# Altium PCB Rackmount_DSP.PcbDoc (part 14 of 24)
Units mil, origin at the board's own origin, x right, y up, seen from the top; angles counter-clockwise.
Board outline 10629.92 x 8267.72 mil, 4 copper layers (Top Layer, Mid Layer 1, Mid Layer 2, Bottom Layer), stack 36.2 mil thick; 4500 components, 1565 nets, 9765 pads, 3289 vias.
Unrouted connection lines stored in the file: 1.
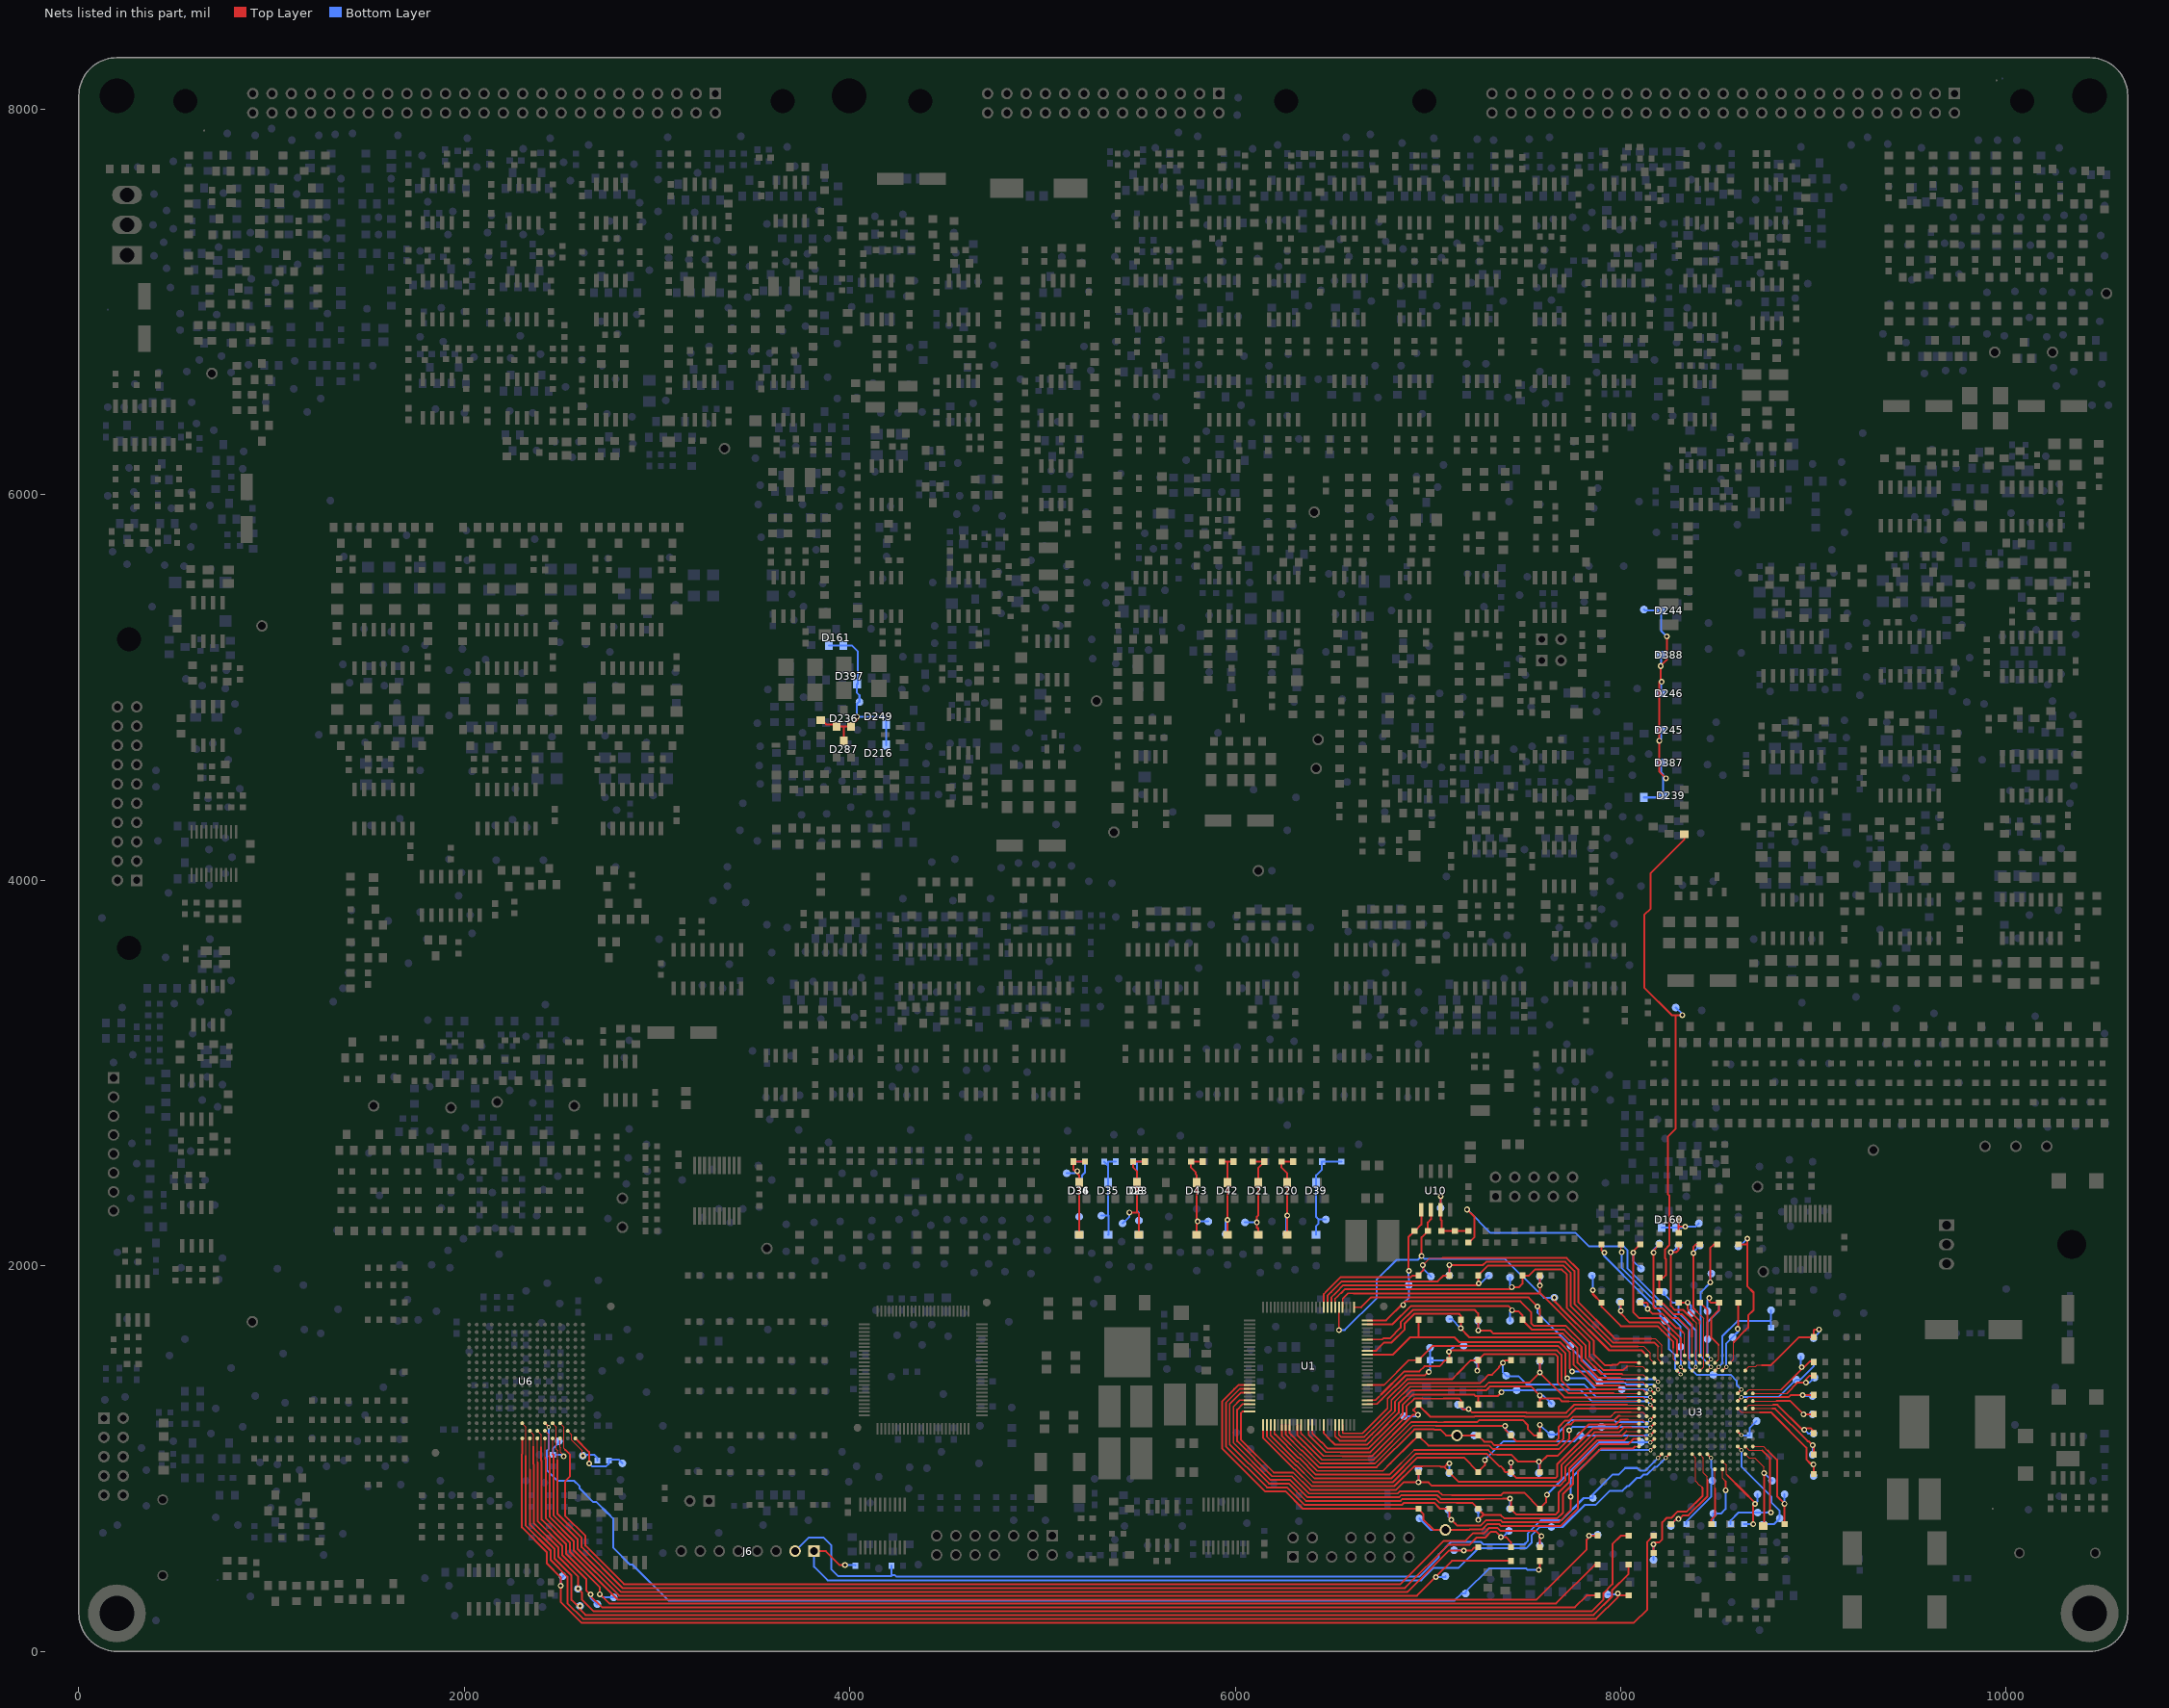
[diagram p16: the nets of this part, all layers, seen from the top]

## Via types
v1: diameter 30, hole 16, Top Layer to Bottom Layer, 3143 vias
v2: diameter 22, hole 12, Top Layer to Bottom Layer, 146 vias

## Nets (pads, with @x,y where several pads share a name; then routed paths per layer and width w, separated by ;. In a path a pad name is that pad's centre, name@x,y a point inside that pad or via, vN(x,y) a via of type N, cw(c..) or ccw(c..) an arc to the next point about the centre after c; other vN are vias at no path point) (continued)
REC_DSP_IS1+: C1079.2 D43.3 R11.1 R925.2 TP710.1 | length 512.4
  Top Layer w10: R11.1@5800,2160 v1@5800,2230 ; v1(5805.13,2230) v1@5800,2230 ; C1079.2@5830,2540 R925.2@5770,2540 5770,2510 5794.66,2485.34 5794.66,2475.34 5800,2470 D43.3@5800,2431.5 v1@5800,2230
  Bottom Layer w10: v1(5805.13,2230) TP710.1@5860,2230
REC_DSP_IS1-: C8.1 D23.3 R7.1 R914.2 TP711.1 | length 566.4
  Top Layer w10: v1(5450.67,2276.92) 5492.93,2276.92 ; R7.1@5500,2160 5500,2269.85 5492.93,2276.92 ; C8.1@5530,2540 R914.2@5470,2540 5470,2510 5490,2490 D23.3@5490,2431.5 5490,2279.85 5492.93,2276.92
  Bottom Layer w10: TP711.1@5415,2220 5450.67,2255.67 v1(5450.67,2276.92)
REC_DSP_IS2+/DSP_VCHG+: C14.2 D21.3 R16.1 R912.1 TP712.1 | length 525.7
  Top Layer w10: R912.1@6090,2540 C14.2@6150,2540 6150,2538.5 6120,2508.5 D21.3@6120,2431.5 6120,2262.82 6112.18,2255 v1(6112.18,2225) 6112.18,2195 6120,2195 R16.1@6120,2160
  Bottom Layer w10: TP712.1@6050,2225 v1(6112.18,2225)
REC_DSP_IS2-/DSP_VCHG-: C3.1 D36.3 R4.1 R906.2 TP713.1 | length 524.6
  Top Layer w10: v1(5180.4,2491.59) v1@5168.41,2491.59 ; R4.1@5190,2160 D36.3@5190,2431.5 5190,2470 v1@5168.41,2491.59 ; R906.2@5220,2540 C3.1@5160,2540 5160,2500 v1@5168.41,2491.59
  Bottom Layer w10: TP713.1@5125,2480 5168.81,2480 v1(5180.4,2491.59)
REC_DSP_IT1+/IBAT+_CHG: C1078.2 D42.3 R10.1 R927.2 TP714.1 | length 518.4
  Top Layer w10: R927.2@5930,2540 5959.27,2540 ; R10.1@5960,2160 v1(5960,2238.94) D42.3@5960,2431.5 5960,2435 5959.27,2435.73 5959.27,2540 ; C1078.2@5990,2540 5959.27,2540
  Bottom Layer w10: TP714.1@5950,2165 5950,2228.94 v1(5960,2238.94)
REC_DSP_IT1-/IBAT-_CHG: C5.1 D8.3 R6.1 R911.2 TP467.1 | length 444.1
  Bottom Layer w10: C5.1@5470,2540 5490,2540 ; R6.1@5500,2160 TP467.1@5500,2235 5500,2273.3 5490,2283.3 D8.3@5490,2431.5 5490,2540 ; R911.2@5530,2540 5490,2540
REC_DSP_IT2+/VBAT+: C13.2 D20.3 R15.1 R917.1 TP715.1 | length 554
  Top Layer w10: R15.1@6270,2160 v1(6270,2261.57) D20.3@6270,2431.5 6270,2480 6240,2510 R917.1@6240,2540 C13.2@6300,2540
  Bottom Layer w10: TP715.1@6265,2165 6265,2261.57 v1(6270,2261.57)
REC_DSP_IT2-/VBAT-: C4.1 D35.3 R3.1 R910.2 TP466.1 | length 486.4
  Bottom Layer w10: TP466.1@5305,2260 5340,2260 ; R910.2@5320,2540 5320,2539.55 5340,2519.55 ; R3.1@5340,2160 5341.31,2160 5341.31,2260 5340,2260 ; C4.1@5380,2540 5340,2540 5340,2519.55 ; 5340,2260 D35.3@5340,2431.5 5340,2519.55
REC_DSP_RESET: C507.1 R1051.2 TP716.1 U1.78 | length 616.3
  Top Layer w9: U1.78@6685.12,1283.15 6735.47,1283.15 6740,1287.68 6760.3,1307.97
  Top Layer w10: 6760.3,1307.97 6883.43,1431.11 6982.4,1431.11 7000.03,1448.74 v1(7004.15,1448.74)
  Bottom Layer w10: v1(7004.15,1448.74) 7010,1454.6 C507.1@7010,1510 ; TP716.1@7010,1575 C507.1@7010,1510 ; R1051.2@7110,1510 C507.1@7010,1510
REC_EEPROM_CTR: R752.1 R753.1 R1031.2 TP735.1 U10.7 | length 382.7
  Top Layer w10: v1(7065,2360.31) U10.7@7065,2290 7065,2240 7070,2235 R753.1@7070,2180 R752.1@7140,2180 R1031.2@7210,2180
  Bottom Layer w10: TP735.1@7065,2300 v1(7065,2360.31)
REC_EXT_IO_0: R1031.1 TP433.1 U3.C6 | length 2221.3
  Top Layer w10: v1(7202.16,2292.18) 7241,2253.34 7241,2150 7211,2120 R1031.1@7210,2120 ; U3.C6@8606.54,1338.43 v2(8626.22,1358.11)
  Bottom Layer w10: v1(7202.16,2292.18) 7203.63,2292.18 7325.23,2170.59 7765.79,2170.59 7836.43,2099.95 8016.78,2099.95 8034.35,2082.37 8034.35,2077.69 8034.35,1988.43 8354.14,1668.64 8354.14,1474.36 8393.5,1435 TP433.1@8480,1435 8569.71,1435 8601,1403.71 8601,1383.33 v2(8626.22,1358.11)
REC_EXT_IO_1: R1071.1 TP736.1 U3.K2 | length 905.1
  Top Layer w6: 8312.2,1572.88 8311.94,1572.88 8311.94,1514.91 U3.K2@8330.94,1495.91
  Top Layer w10: R1071.1@8100,2110 8099,2110 8064.35,2075.35 v1(8064.35,2068.2) 8064.35,1759.59 8095.8,1728.14 8206.54,1728.14 8269.68,1665 8312.2,1622.48 8312.2,1572.88
  Bottom Layer w10: v1(8064.35,2068.2) 8064.35,2025.65 TP736.1@8105,1985
REC_EXT_IO_2: R1072.1 TP737.1 U3.L1 | length 539.1
  Top Layer w10: R1072.1@8000,1810 v1@8000,1766.4 ; v1(8000.67,1765.73) v1@8000,1766.4 ; U3.L1@8291.57,1535.28 8291.57,1566.45 8292.2,1567.08 8292.2,1614.19 8241.4,1665 8198.89,1707.51 8044.35,1707.51 8000,1751.86 v1@8000,1766.4
  Bottom Layer w10: TP737.1@7995,1815 7995,1771.4 v1(8000.67,1765.73)
REC_EXT_IO_3: R1073.1 TP432.1 U3.K3 | length 791.4
  Top Layer w6: R1073.1@8000,2110 8000,2074.3 v1(8004.35,2069.95)
  Top Layer w10: v2(8311.26,1476.22) U3.K3@8330.94,1456.54
  Bottom Layer w10: v1(8004.35,2069.95) 8004.51,2069.95 8004.51,1989.99 8310,1684.5 TP432.1@8310,1580 8311.26,1580 v2(8311.26,1476.22)
REC_EXT_IO_4: R1074.1 TP738.1 U3.K1 | length 480.9
  Top Layer w6: 8323.24,1653.93 8330.94,1646.22 U3.K1@8330.94,1535.28
  Top Layer w10: R1074.1@8100,1810 8133.58,1810 8139,1804.58 v1(8139,1776.7) 8163.71,1752 8212.95,1752 8288.34,1676.6 8300.57,1676.6 8312.17,1665 8323.24,1653.93
  Bottom Layer w10: TP738.1@8100,1815 8138.3,1776.7 v1(8139,1776.7)
REC_EXT_IO_5: R1050.1 TP739.1 U3.A13 | length 553.7
  Top Layer w6: U3.A13@8685.28,1062.83 8739.45,1062.83 8760.71,1041.57 8763.44,1041.57 8763.44,1041
  Top Layer w10: 8763.44,1041 8790,1014.43 8810.89,993.54 8810.89,804.89 8849.41,766.37 8849.41,766.06 v1(8850,766.06) R1050.1@8850,660
  Bottom Layer w10: v1(8850,766.06) TP739.1@8850,815
REC_EXT_IO_6: R999.1 TP740.1 U3.H3 | length 762.1
  Top Layer w6: 8396.3,1761.02 8430.27,1727.06 8430.27,1691.13 8429.85,1690.71 8429.85,1665 8429.85,1476.7 U3.H3@8409.68,1456.54
  Top Layer w10: 8396.3,1761.02 8377.35,1779.98 v1(8377.35,2066.65) 8377.35,2099.18 8388.17,2110 R999.1@8410,2110
  Bottom Layer w10: v1(8377.35,2066.65) 8377.35,2072.35 TP740.1@8410,2105
REC_EXT_IO_7: R1000.1 TP431.1 U3.G3 | length 778.7
  Top Layer w10: U3.G3@8449.06,1456.54 v2(8468.74,1476.22) ; v1(8463.74,1914.9) 8463.74,2091.78 8481.95,2110 R1000.1@8500,2110
  Bottom Layer w10: v2(8468.74,1476.22) 8415,1529.96 8415,1862.63 8463.74,1911.36 v1(8463.74,1914.9) 8463.74,1950.44 8471.65,1958.35 TP431.1@8470,1960
REC_EXT_IO_8: R1060.1 TP741.1 U3.J14 | length 783.2
  Top Layer w6: U3.J14@8370.32,1023.46 8389.32,1004.46 8389.32,882.79 ; 8389.34,882.76 8389.34,880.9 8405.74,864.5 8407.49,864.5 8421.94,850.05
  Top Layer w10: R1060.1@8170,510 v1(8170,555.91) 8170,565.91 8200,565.91 8215,580.91 8215,669.22 8238.47,692.69 8263.45,692.69 8296.36,725.6 8343.1,725.6 8424.92,807.43 8424.92,835 8424.92,847.06 8421.94,850.05
  Bottom Layer w10: TP741.1@8170,475 v1(8170,555.91)
REC_EXT_IO_9: R1055.1 TP742.1 U3.H14 | length 544.4
  Top Layer w6: U3.H14@8409.68,1023.46 8428.68,1004.46 8428.68,925.45 8448.21,905.92 8448.21,889.3
  Top Layer w10: R1055.1@8260,660 8261,660 8287.69,686.69 v1(8299.99,686.69) 8305.21,686.69 8323.81,705.3 8351.19,705.3 8448.21,802.32 8448.21,835 8448.21,889.3
  Bottom Layer w10: TP742.1@8260,650 8260,658.52 8288.17,686.69 v1(8299.99,686.69)
REC_EXT_IO_10: R1059.1 TP446.1 U3.B13 | length 687.3
  Top Layer w6: U3.B13@8645.91,1062.83 8665.41,1043.33 8732.82,1043.33
  Top Layer w10: 8732.82,1043.33 8773.09,1003.06 8773.09,835 8773.09,721.3 8779.21,721.3 v1(8779.21,720.49)
  Bottom Layer w10: R1059.1@8570,660 8570,679.22 8610.78,720 TP446.1@8710,720 8761.36,720 8762.66,721.3 8779.21,721.3 v1(8779.21,720.49)
REC_EXT_IO_11: R1004.1 U3.F16 | length 292.4
  Top Layer w6: 8488.43,844.72 U3.F16@8488.43,944.72
  Top Layer w10: R1004.1@8470,660 8470,683.45 8488.43,701.87 8488.43,835 8488.43,844.72
REC_EXT_IO_12: R1005.1 TP445.1 U3.G14 | length 434.9
  Top Layer w10: U3.G14@8449.06,1023.46 v2(8468.74,1003.78)
  Bottom Layer w10: R1005.1@8340,660 8339.56,660 8339.56,673.02 8468.74,802.19 8468.74,864.37 8480,875.63 8480,880 TP445.1@8475,885 8475,945.76 8468.74,952.02 v2(8468.74,1003.78)
REC_EXT_IO_13: R1006.1 TP744.1 U3.H1 | length 410.4
  Top Layer w6: U3.H1@8409.68,1535.28 8409.68,1558.28 8410.34,1558.93 8410.34,1665 8410.34,1698.58
  Top Layer w10: R1006.1@8300,1810 8347.11,1810 v1(8347.35,1809.76) 8347.35,1775.82 8410.34,1712.82 8410.34,1698.58
  Bottom Layer w10: v1(8347.35,1809.76) 8365,1792.11 TP744.1@8365,1755
REC_EXT_IO_14: R1007.1 TP444.1 U3.E3 | length 389.7
  Top Layer w10: U3.E3@8527.8,1456.54 v2(8547.48,1476.22) ; v1(8607.03,1673.08) 8607.03,1675.06 8609,1677.03 8609,1698.17 8610,1698.17 R1007.1@8610,1810
  Bottom Layer w10: v2(8547.48,1476.22) 8547.48,1597.48 TP444.1@8580,1630 8609,1659 8609,1671.11 v1(8607.03,1673.08)
REC_EXT_IO_15: R1008.1 TP745.1 U3.F2 | length 496.2
  Top Layer w6: U3.F2@8488.43,1495.91 8508.7,1516.18 8508.7,1557.6 8508.96,1557.86 8508.96,1586.17 8507.57,1587.56 8507.57,1590.34
  Top Layer w10: v1(8460,1833.13) 8460,1816.54 8466.54,1810 R1008.1@8509,1810 ; 8507.57,1590.34 8470.27,1627.64 8470.27,1665 8470.27,1730.55 8509,1769.28 R1008.1@8509,1810 ; R1008.1@8510,1810 R1008.1@8509,1810
  Bottom Layer w10: TP745.1@8450,1765 8450,1823.13 v1(8460,1833.13)
REC_EXT_IO_16: R1009.1 TP746.1 U3.D2 | length 817.6
  Top Layer w6: U3.D2@8567.17,1495.91 8586.53,1515.27 8586.53,1603.92
  Top Layer w10: 8586.53,1603.92 8587.17,1604.56 8587.17,1606.31 8645.85,1665 8661.03,1680.18 8661.03,1743.02 8688.95,1770.94 8688.95,1861.27 8656.14,1894.08 8656.14,2109.47 8655.6,2110 ; R1009.1@8610,2110 8655.6,2110 ; v1(8656.14,2140.53) 8656.14,2110.53 8655.6,2110
  Bottom Layer w10: TP746.1@8610,2100 8614.5,2100 8655.04,2140.53 v1(8656.14,2140.53)
REC_EXT_IO_17: R1010.1 U3.G1 | length 291.5
  Top Layer w6: U3.G1@8449.06,1535.28 8449.06,1635.28
  Top Layer w10: R1010.1@8410,1810 8411,1810 8449.06,1771.94 8449.06,1665 8449.06,1635.28
REC_EXT_IO_18: R1011.1 TP747.1 U3.E15 | length 505.6
  Top Layer w6: U3.E15@8527.8,984.09 8546.91,964.98 8546.91,919.68 8555.14,911.44
  Top Layer w10: 8555.14,911.44 8631.59,835 8696.85,769.73 v1(8696.85,765.35) 8687.61,765.35 v1(8687.61,660.79)
  Bottom Layer w10: R1011.1@8640,660 8686.83,660 v1(8687.61,660.79) ; v1(8696.85,765.35) 8710,778.5 TP747.1@8710,815
REC_EXT_IO_19: R1012.1 TP443.1 U3.L3 | length 874.8
  Top Layer w6: U3.L3@8291.57,1456.54 8310.85,1437.26 v2(8310.85,1436.96)
  Top Layer w10: R1012.1@7900,2110 7900,2080 7910.72,2069.28 v1(7914.51,2069.28)
  Bottom Layer w10: v1(7914.51,2069.28) 7913.26,2069.28 7913.26,2051.12 8114.38,1850 8114.5,1850 8205.25,1759.25 8205.25,1739.75 TP443.1@8230,1715 8230,1707.25 8250,1687.25 8250,1567.5 8282.82,1534.68 8282.82,1464.99 v2(8310.85,1436.96)
REC_EXT_IO_20: R1013.1 TP748.1 U3.B3 | length 548.1
  Top Layer w6: U3.B3@8645.91,1456.54 8666.28,1476.91 8701,1476.91 8708.39,1484.29 8730.33,1484.29
  Top Layer w10: 8730.33,1484.29 8778.71,1484.29 8790,1495.58 8924.42,1630 R1013.1@9000,1630 9000,1665 9005,1670 v1(9028.33,1670)
  Bottom Layer w10: TP748.1@9000,1625 9028.33,1653.33 v1(9028.33,1670)
REC_EXT_IO_21: R1014.2 TP749.1 U3.L2 | length 750.8
  Top Layer w6: 8272.2,1575.36 8272.2,1515.28 U3.L2@8291.57,1495.91
  Top Layer w10: v1(7855,1873.97) 7855,1854 7899,1810 R1014.2@7900,1810 7900,1787.03 7999.9,1687.13 8190.98,1687.13 8213.11,1665 8272.2,1605.91 8272.2,1575.36
  Bottom Layer w10: TP749.1@7850,1950 7852.2,1950 7855,1947.2 v1(7855,1873.97)
REC_EXT_IO_22: R1054.2 TP442.1 U3.E16 | length 341.8
  Top Layer w6: U3.E16@8527.8,944.72 8527.8,897.93 8544.02,881.71
  Top Layer w10: v1(8544.02,835.71) 8544.02,881.71
  Bottom Layer w10: R1054.2@8480,660 TP442.1@8480,715 8520.74,715 8544.02,738.28 v1(8544.02,835.71)
REC_EXT_IO_23: R1056.2 TP441.1 U3.C13 | length 560.8
  Top Layer w10: U3.C13@8606.54,1062.83 v2(8626.22,1043.15)
  Bottom Layer w10: v2(8626.22,1043.15) 8626.22,957.64 8782.5,801.36 8782.5,771.27 8825,728.77 TP441.1@8825,690 8795,660 R1056.2@8740,660
REC_EXT_IO_24: R1067.2 U3.J1 | length 377.8
  Top Layer w6: U3.J1@8370.32,1535.28 8370.32,1632.6
  Top Layer w10: R1067.2@8200,1810 8213.84,1810 8275.48,1748.37 8317.18,1748.37 8370.32,1695.23 8370.32,1665 8370.32,1632.6
REC_EXT_IO_25: R1017.2 TP750.1 U3.J2 | length 812.5
  Top Layer w6: 8350.63,1664.06 8350.63,1515.59 U3.J2@8370.32,1495.91
  Top Layer w8: 8350.19,1675.62 8350.19,1665 8350.19,1664.5 8350.63,1664.06
  Top Layer w10: v1(8170.56,2068.73) v1@8169.76,2068.73 ; R1017.2@8200,2110 8199,2110 8169.76,2080.76 v1@8169.76,2068.73 ; 8350.19,1675.62 8298.05,1727.76 8266.81,1727.76 8214.6,1779.98 8175.55,1779.98 8169,1786.53 8169,2021.21 8169.76,2021.98 v1@8169.76,2068.73
  Bottom Layer w10: v1(8170.56,2068.73) 8169.76,2068.73 8169.76,2084.76 TP750.1@8200,2115
REC_EXT_IO_26: R1018.2 TP440.1 U3.J3 | length 503.5
  Top Layer w6: U3.J3@8370.32,1456.54 8389.28,1475.5 v2(8389.28,1475.99)
  Bottom Layer w10: TP440.1@8225,1865 8224.77,1864.77 8224.77,1852.91 8267.68,1810 R1018.2@8300,1810 8300,1755.5 8389.28,1666.23 v2(8389.28,1475.99)
REC_EXT_IO_27: R1019.2 TP751.1 U3.H2 | length 789.3
  Top Layer w6: 8377.96,1716.92 8392.34,1702.54 8392.34,1665 8392.34,1560.91 8390.68,1559.25 8390.68,1515.28 8409.68,1496.28 U3.H2@8409.68,1495.91
  Top Layer w10: R1019.2@8300,2110 8300,2083.16 8286.84,2070 v1(8260,2070) 8260,1792.13 8281.57,1770.56 8324.32,1770.56 8377.96,1716.92
  Bottom Layer w10: v1(8260,2070) 8265,2070 TP751.1@8300,2105
REC_EXT_IO_28: R1020.2 TP439.1 U3.F3 | length 570.1
  Top Layer w10: U3.F3@8488.43,1456.54 v2(8508.11,1476.22)
  Bottom Layer w10: v2(8508.11,1476.22) 8527.48,1495.59 8527.48,1636.46 8604.85,1713.83 8605.05,1713.62 8776.38,1713.62 ; R1020.2@8780,1680 8780,1710 8776.38,1713.62 ; TP439.1@8780,1770 8780,1720.69 8776.38,1717.07 8776.38,1713.62
REC_EXT_IO_29: R1021.2 TP438.1 U3.G2 | length 354.9
  Top Layer w10: U3.G2@8449.06,1495.91 v2(8468.74,1515.59)
  Bottom Layer w10: v2(8468.74,1515.59) 8450,1534.33 TP438.1@8450,1620 8450,1708.88 8510,1768.88 R1021.2@8510,1810
REC_EXT_IO_30: R1075.2 TP752.1 U3.A6 | length 416.5
  Top Layer w6: U3.A6@8685.28,1338.43 8790,1338.43 8862.08,1338.43 8862.62,1338.96
  Top Layer w10: 8862.62,1338.96 8918.56,1394.91 v1(8960.49,1394.91) 8960.49,1410.11 8980.38,1430 R1075.2@9000,1430
  Bottom Layer w10: v1(8960.49,1394.91) 8979.91,1394.91 TP752.1@9005,1420
REC_EXT_IO_31: R1076.1 TP753.1 U3.B6 | length 488.1
  Top Layer w6: U3.B6@8645.91,1338.43 8664.91,1357.43 8790,1357.43 8831.94,1357.43
  Top Layer w10: 8831.94,1357.43 8939.29,1464.77 v1(8939.29,1475) 8952.13,1475 8980.16,1503.02 9000,1503.02 R1076.1@9000,1500
  Bottom Layer w10: TP753.1@8935,1530 8935,1479.29 v1(8939.29,1475)
REC_EXT_IO_32: R996.1 TP754.1 U3.C8 | length 690.5
  Top Layer w6: U3.C8@8606.54,1259.68 8626.22,1240 8722.01,1240
  Top Layer w10: 8722.01,1240 8779.55,1240 8790,1229.55 8962.62,1056.93 8962.62,996.13 8983.83,974.91 v1@8999.78,974.91 ; v1(8999.78,969.69) v1@8999.78,974.91 ; R996.1@9000,920 9000,958.75 8991.81,966.94 v1@8999.78,974.91
  Bottom Layer w10: v1(8999.78,969.69) 8999.78,974.91 8991.81,966.94 9000,958.75 TP754.1@9000,910
REC_EXT_IO_33: R995.1 TP755.1 U3.B8 | length 493.4
  Top Layer w6: U3.B8@8645.91,1259.68 8664.91,1278.68 8790,1278.68 8790.84,1278.68
  Top Layer w10: 8790.84,1278.68 8813.29,1278.68 8942.53,1149.44 v1(8952.23,1149.44) 8959.39,1156.61 8987.28,1156.61 9000,1143.89 R995.1@9000,1130
  Bottom Layer w10: v1(8952.23,1149.44) 8971.67,1130 TP755.1@9000,1130
REC_EXT_IO_34: R994.1 TP756.1 U3.A8 | length 488.8
  Top Layer w6: U3.A8@8685.28,1259.68 8784.75,1259.68 8785.75,1258.68 8786.32,1258.68
  Top Layer w10: 8786.32,1258.68 8790,1258.68 8800.56,1258.68 8969.03,1090.22 8973.79,1090.22 v1(8995,1069) 9000,1064 R994.1@9000,1020
  Bottom Layer w10: TP756.1@8995,1020 v1(8995,1069)
REC_EXT_IO_35: R993.1 TP500.1 U3.C7 | length 489.5
  Top Layer w10: U3.C7@8606.54,1299.06 v2(8626.22,1318.74)
  Bottom Layer w10: v2(8626.22,1318.74) 8818.74,1318.74 TP500.1@8910,1410 8931.93,1410 9000,1478.07 R993.1@9000,1500
REC_EXT_IO_36: R997.1 TP758.1 U3.B7 | length 419.7
  Top Layer w6: U3.B7@8645.91,1299.06 8665.82,1318.96 8790,1318.96 8829.57,1318.96
  Top Layer w10: 8829.57,1318.96 8870.9,1318.96 8881.93,1330 v1(8944.33,1330) R997.1@9000,1330
  Bottom Layer w10: v1(8944.33,1330) 8949.33,1325 TP758.1@8995,1325
REC_EXT_IO_37: R998.1 TP757.1 U3.A7 | length 390.8
  Top Layer w6: U3.A7@8685.28,1299.06 8790,1299.06 8810.08,1299.06
  Top Layer w10: 8810.08,1299.06 8879.6,1299.06 8947.92,1230.73 v1(8947.92,1230) R998.1@9000,1230
  Bottom Layer w10: v1(8947.92,1230) TP757.1@8995,1230
REC_GPIO_0: R26.1 TP759.1 U1.47 U3.R12 | length 2953.5
  Top Layer w6: 8029.48,1105.34 8046.49,1122.35 8113.94,1122.35 U3.R12@8134.09,1102.2
  Top Layer w9: U1.47@6074.88,1302.83 6040,1302.83 6023.7,1302.83 5990.29,1269.42 5990.29,1082.13 6183.2,889.21 6284.55,889.21 6374.26,799.5 6850.02,799.5 6860.52,810 6901.63,810 ; 7290.99,791 7386.98,791 7388.81,792.83 v1(7425,792.83)
  Top Layer w10: 6901.63,810 7047.37,810 7066.37,791 7290.99,791 ; v1(7425,792.83) 7430,787.83 R26.1@7430,740 7430,739 7460,709 7661.21,709 7677.41,725.2 7677.41,823.99 7732.4,878.98 7732.4,947.88 7879.95,1095.42 7955,1095.42 8019.56,1095.42 8029.48,1105.34
  Bottom Layer w10: TP759.1@7425,740 v1(7425,792.83)
REC_GPIO_1: R27.1 TP760.1 U1.44 U3.P13 | length 3142.1
  Top Layer w6: v2(8154.37,1043.57) 8154.37,1043.74 U3.P13@8173.46,1062.83
  Top Layer w9: 5951.34,1175.24 5951.34,1289.53 6023.7,1361.89 6040,1361.89 U1.44@6074.88,1361.89
  Top Layer w10: 5951.34,1175.24 5951.34,1064.19 6164.81,850.71 6268.6,850.71 6358.32,761 6865.97,761 6875.97,771 7031.21,771 7062.21,740 R27.1@7110,740 7110,694.43 7120.54,683.89 v1(7120.54,682.94) 7141.76,661.73 7142.7,661.73 7152.79,651.64 7272.29,651.64 7301.21,680.56 7376.1,680.56 7387.66,669 7677.78,669 7739.59,730.8 v1(7739.59,802.09)
  Bottom Layer w10: TP760.1@7105,735 7105,698.49 v1(7120.54,682.94) ; v1(7739.59,802.09) 7739.59,895 7888.16,1043.57 v2(8154.37,1043.57)
REC_GPIO_2: R28.1 TP761.1 U1.45 U3.T12 | length 2992.6
  Top Layer w9: U1.45@6074.88,1342.2 6040,1342.2 6030.88,1342.2 5970.94,1282.26 5970.94,1073.61 6174.33,870.21 6276.68,870.21 6366.39,780.5 6857.89,780.5 6867.89,790.5 7039.29,790.5 7058.79,771 7148.79,771
  Top Layer w10: 7148.79,771 7230,771 7260,741 R28.1@7260,740 7260,739 7285.61,713.39 7285.61,707.38 ; v1(7259.86,681.64) 7285.61,707.38 ; U3.T12@8094.72,1102.2 8066.94,1102.2 8040.09,1075.35 7955,1075.35 7888.32,1075.35 7752.84,939.87 7752.84,869.74 7700.02,816.93 7700.02,719.52 7669.5,689 7395.95,689 7377.56,707.38 7285.61,707.38
  Bottom Layer w10: v1(7259.86,681.64) 7260,681.78 TP761.1@7260,735
REC_GPIO_3: R29.1 TP499.1 U1.48 U3.P12 | length 2741.8
  Top Layer w9: U1.48@6074.88,1283.15 6040,1283.15 6038.82,1283.15 6009.5,1253.83 6009.5,1090.03 6191.31,908.21 6292.42,908.21 6382.13,818.5 6842.15,818.5 6853.15,829.5 7055.44,829.5 7073.94,811 7122.44,811
  Top Layer w10: 7122.44,811 7379.4,811 7391.23,822.83 7498.17,822.83 R29.1@7580,741 ; R29.1@7580,740 R29.1@7580,741 ; v1(7616.56,812.33) 7611.85,807.63 7611.85,772.85 R29.1@7580,741 ; v2(8153.78,1082.52) U3.P12@8173.46,1102.2
  Bottom Layer w10: v1(7616.56,812.33) 7889.22,1085 TP499.1@8105,1085 8151.3,1085 v2(8153.78,1082.52)
REC_GPIO_4: R30.1 TP762.1 U1.51 U3.R11 | length 2487.9
  Top Layer w6: 8051.51,1161.53 8114.14,1161.53 U3.R11@8134.09,1141.57
  Top Layer w9: U1.51@6143.78,1174.88 6143.78,1125 6143.78,1107.46 6305.02,946.21 6308.16,946.21 6396.37,858 6825.79,858 ; 6970.86,961 7061.96,961 7066.35,956.61 7084.39,956.61 7110,931 R30.1@7110,930
  Top Layer w10: 6825.79,858 6928.79,961 6970.86,961 ; 7084.39,956.61 7103.05,975.26 v1(7110,975.26) ; R30.1@7110,930 7110,929 7160,879 7674.23,879 7691.89,896.66 7691.89,965.13 7862.87,1136.11 7955,1136.11 7989.96,1136.11 8015.38,1161.53 8051.51,1161.53
  Bottom Layer w10: TP762.1@7110,925 v1(7110,975.26)
REC_GPIO_5: R31.1 TP763.1 U1.53 U3.T10 | length 2424.4
  Top Layer w6: 8000.62,1175.05 8006.51,1180.94 U3.T10@8094.72,1180.94
  Top Layer w9: U1.53@6183.15,1174.88 6183.15,1125 6183.15,1121.83 6320.76,984.21 6323.9,984.21 6410.73,897.38 6808.6,897.38
  Top Layer w10: 6808.6,897.38 6936.48,1025.26 7304.45,1025.26 7369.71,960 7376.82,960 7394.39,942.43 7394.39,935.61 7400,930 R31.1@7430,930 ; v1(7430,978.85) R31.1@7430,930 ; 8000.62,1175.05 7982.17,1156.6 7955,1156.6 7854.94,1156.6 7670.52,972.18 7670.52,908.31 7661.21,899 7460,899 7430,929 R31.1@7430,930
  Bottom Layer w10: TP763.1@7430,925 v1(7430,978.85)
REC_GPIO_6: R32.1 TP498.1 U1.56 U3.P10 | length 2255.8
  Top Layer w9: U1.56@6242.2,1174.88 6242.2,1125 6242.2,1116.51 6336.5,1022.21 6339.64,1022.21 6425.97,935.88 6765.88,935.88 6805.35,975.35
  Top Layer w10: 6805.35,975.35 6923.39,1093.39 6924.39,1093.39 R32.1@6950,1119 ; R32.1@6950,1120 R32.1@6950,1119 ; v1(7732.85,1147.77) 7732.85,1104.07 7677.78,1049 7335.86,1049 7317.41,1067.46 7001.54,1067.46 R32.1@6950,1119 ; v2(8153.78,1161.26) U3.P10@8173.46,1180.94
  Bottom Layer w10: v1(7732.85,1147.77) 7734.57,1147.77 7751.81,1165 TP498.1@7900,1165 8153.78,1165 v2(8153.78,1161.26)
REC_GPIO_7: R33.1 TP764.1 U1.58 U3.R9 | length 2250.9
  Top Layer w6: 8053.27,1239.91 8114.5,1239.91 U3.R9@8134.09,1220.32
  Top Layer w8: 7953.7,1223.45 7955,1224.75 7970.39,1240.14 8053.27,1240.14 8053.27,1239.91
  Top Layer w9: U1.58@6281.57,1174.88 6281.57,1130.88 6287.46,1125 6351.74,1060.71 6354.88,1060.71 6440.71,974.88 6725.09,974.88 6920.71,1170.5 7039.29,1170.5 7040.29,1169.5 7071.63,1169.5 7072.13,1169 7262.8,1169 7263.7,1169.9 7264.41,1169.9
  Top Layer w10: 7264.41,1169.9 v1(7399.22,1169.9) 7399.22,1151.78 7430,1121 R33.1@7430,1120 7430,1119 7460,1089 7661.21,1089 7676.43,1104.21 7676.43,1162.05 7712.14,1197.77 7733.47,1197.77 7753.41,1217.71 7947.96,1217.71 7953.7,1223.45
  Bottom Layer w10: v1(7399.22,1169.9) 7399.22,1155.78 TP764.1@7430,1125
REC_GPIO_8: R34.1 TP765.1 U1.60 U3.P9 | length 2213.6
  Top Layer w9: U1.60@6320.94,1174.88 6320.94,1125 6320.94,1123.7 6450.76,993.88 6717.22,993.88 6912.84,1189.5 7047.16,1189.5 7048.16,1188.5 7082,1188.5
  Top Layer w10: 7082,1188.5 7254.72,1188.5 7266.12,1199.9 7491.97,1199.9 7517.25,1174.61 7517.25,1152.75 7550,1120 R34.1@7580,1120 v1(7580,1175.4) ; v2(8153.78,1200.63) U3.P9@8173.46,1220.32
  Bottom Layer w10: v1(7580,1175.4) 7630.4,1125 TP765.1@7640,1125 7667.66,1125 7742.66,1200 7964.29,1200 7974.29,1190 8143.15,1190 v2(8153.78,1200.63)
REC_GPIO_9: R35.1 TP766.1 U1.61 U3.T8 | length 2127.3
  Top Layer w9: U1.61@6340.63,1174.88 6340.63,1130.88 6346.51,1125 6458.13,1013.38 6555.03,1013.38
  Top Layer w10: 6555.03,1013.38 6709.14,1013.38 6922.88,1227.12 v1(6947.45,1227.12) 6924.39,1250.18 6924.39,1253.39 R35.1@6950,1279 ; R35.1@6950,1280 R35.1@6950,1279 ; U3.T8@8094.72,1259.68 8039.77,1259.68 8039.45,1259.37 7955,1259.37 7766.79,1259.37 7725.19,1217.77 7502.38,1217.77 7500.25,1219.9 7243.81,1219.9 7239.69,1215.79 7013.21,1215.79 R35.1@6950,1279
  Bottom Layer w10: TP766.1@6875,1220 6940.33,1220 v1(6947.45,1227.12)
REC_GPIO_10: R36.1 TP497.1 U1.64 U3.P8 | length 2095.3
  Top Layer w9: U1.64@6399.69,1174.88 6399.69,1130.88 6405.57,1125 6445.33,1085.24 6446.53,1085.24
  Top Layer w10: 6446.53,1085.24 6478.39,1053.38 6692.19,1053.38 6868.1,1229.29 6868.1,1278.59 6920.5,1331 7240.31,1331 7247.99,1323.31 7260,1323.31 ; R36.1@7260,1280 7260,1323.31 ; v1(7381.59,1344.53) 7360.38,1323.31 7260,1323.31 ; v2(8153.78,1279.37) U3.P8@8173.46,1259.68
  Bottom Layer w10: v1(7381.59,1344.53) 7392.06,1355 TP497.1@7460,1355 7564.65,1355 7567.57,1357.93 7788.79,1357.93 7848.96,1297.75 8135.39,1297.75 v2(8153.78,1279.37)
REC_GPIO_11: R37.1 TP767.1 U1.70 U3.R7 | length 2043.1
  Top Layer w6: 8026.72,1317.77 8027.06,1317.77 8027.41,1318.12 8115.03,1318.12 U3.R7@8134.09,1299.06
  Top Layer w9: U1.70@6517.8,1174.88 6517.8,1125 6517.8,1116.51 6541.43,1092.88 6675.82,1092.88 6707.94,1125 6740,1157.06 6828.6,1245.65 6828.6,1294.96 6907.05,1373.41 7293.46,1373.41 7314.58,1394.53 7320.53,1394.53
  Top Layer w10: 7320.53,1394.53 7527.99,1394.53 v1(7580,1446.54) ; R37.1@7580,1510 v1(7580,1446.54) ; 8026.72,1317.77 7955,1317.77 7708.77,1317.77 v1(7580,1446.54)
  Bottom Layer w10: v1(7580,1446.54) TP767.1@7580,1505
REC_GPIO_12: R38.1 TP496.1 U1.1 U3.P4 | length 1907.4
  Top Layer w6: U3.P4@8173.46,1417.17 8192.56,1398.07 v2(8193.59,1398.07)
  Top Layer w9: U1.1@6616.22,1785.12 6652.62,1785.12
  Top Layer w10: 6652.62,1785.12 6702.51,1835 6703.3,1835.8 7522.13,1835.8 7567.35,1790.58 v1(7567.35,1789.03) 7580,1776.38 R38.1@7580,1720
  Bottom Layer w10: v1(7567.35,1789.03) 7567.35,1757.65 TP496.1@7740,1585 7740,1574.52 7854.52,1460 7886.72,1460 7931.72,1415 8027.78,1415 8031.5,1411.28 8180.38,1411.28 v2(8193.59,1398.07)
REC_GPIO_13: R39.1 TP768.1 U1.95 U3.R5 | length 1838.3
  Top Layer w6: 8011.35,1399.19 8013.05,1397.48 8114.41,1397.48 U3.R5@8134.09,1377.8
  Top Layer w9: U1.95@6685.12,1617.8 6740,1617.8 6761.48,1617.8 6767.63,1623.95 6770.16,1623.95
  Top Layer w10: 6770.16,1623.95 6802.11,1623.95 6858.22,1680.05 6858.22,1708.71 6921.05,1771.55 7241.52,1771.55 7260,1753.07 R39.1@7260,1720 v1(7260,1665.24) 7260,1664.79 7323,1664.79 7339.07,1648.71 7699.06,1648.71 7775.18,1572.6 7775.18,1497.02 7873.01,1399.19 7955,1399.19 8011.35,1399.19
  Bottom Layer w10: v1(7260,1665.24) TP768.1@7260,1715
REC_GPIO_14: R40.1 TP769.1 U1.8 U3.N2 | length 2311.1
  Top Layer w6: 8193.83,1580.47 8193.83,1514.91 U3.N2@8212.83,1495.91
  Top Layer w9: U1.8@6478.43,1785.12 6478.43,1835 6478.43,1844.9 6498.53,1865.01
  Top Layer w10: 6498.53,1865.01 6552.52,1919 7049.67,1919 7080.67,1950 R40.1@7110,1950 v1(7110,2004.61) 7285.33,2004.61 7301.72,2021 7711.37,2021 7759.33,1973.04 7759.33,1801.84 7955,1606.17 7958.65,1602.52 8173.77,1602.52 8193.83,1582.45 8193.83,1580.47
  Bottom Layer w10: TP769.1@7110,1950 v1(7110,2004.61)
REC_GPIO_15: R41.1 TP770.1 U1.9 U3.N1 | length 2337.5
  Top Layer w6: v1(6972.24,2003.54) 7009.71,2041 7076.77,2041 ; 8159.28,1622.6 8179.15,1622.6 8212.83,1588.91 U3.N1@8212.83,1535.28
  Top Layer w9: U1.9@6458.74,1785.12 6458.74,1835 6458.74,1853.5 6474.55,1869.31
  Top Layer w10: 6474.55,1869.31 6546.97,1941.73 6911.73,1941.73 6920,1950 R41.1@6950,1950 6950,1951 6975.61,1976.61 6975.61,2000.17 v1(6972.24,2003.54) ; 7076.77,2041 7719.66,2041 7779.33,1981.33 7779.33,1812.17 7955,1636.5 7968.86,1622.65 8159.22,1622.65 8159.28,1622.6
  Bottom Layer w10: v1(6972.24,2003.54) 6972.24,1987.76 TP770.1@7015,1945
REC_GPIO_16: R42.1 TP771.1 U1.50 U3.T11 | length 2662.7
  Top Layer w6: 8028.56,1141.57 U3.T11@8094.72,1141.57
  Top Layer w9: U1.50@6074.88,1243.78 6040,1243.78 6036.86,1243.78 6028.59,1235.51 6028.59,1098.43 6199.8,927.21 6300.29,927.21 6389.5,838 6395.19,838
  Top Layer w10: 6395.19,838 6834.07,838 6872.94,876.87 v1(6950,876.87) ; R42.1@6950,930 v1(6950,876.87) ; 8028.56,1141.57 8002.95,1115.97 7955,1115.97 7872.06,1115.97 7712.26,956.18 7712.26,887.8 7683.46,859 7020,859 7002.13,876.87 v1(6950,876.87)
  Bottom Layer w10: v1(6950,876.87) TP771.1@6950,945
REC_GPIO_17: R43.1 TP495.1 U1.52 U3.P11 | length 2356.4
  Top Layer w9: U1.52@6163.46,1174.88 6163.46,1125 6163.46,1114.64 6312.89,965.21 6316.03,965.21 6403.74,877.5 6817,877.5
  Top Layer w10: 6817,877.5 6944.76,1005.26 7185.74,1005.26 R43.1@7260,931 ; R43.1@7260,930 R43.1@7260,931 ; v1(7294.44,992.85) 7294.44,965.44 R43.1@7260,931 ; v2(8153.78,1121.89) U3.P11@8173.46,1141.57
  Bottom Layer w10: v1(7294.44,992.85) 7391.59,1090 7760,1090 TP495.1@7790,1120 8125.89,1120 8127.78,1121.89 v2(8153.78,1121.89)
REC_GPIO_18: R44.1 TP772.1 U1.54 U3.R10 | length 2356
  Top Layer w6: 8036.88,1201.14 8113.9,1201.14 U3.R10@8134.09,1180.94
  Top Layer w9: U1.54@6202.83,1174.88 6202.83,1129.01 6206.85,1125 6328.63,1003.21 6331.77,1003.21 6418.1,916.88 6800.52,916.88 6928.4,1044.76 7312.52,1044.76 7336.79,1020.5 7358.78,1020.5
  Top Layer w10: 7358.78,1020.5 7430.78,1020.5 7467.75,983.53 v1(7575,983.53) ; R44.1@7580,930 7580,978.53 v1(7575,983.53) ; 8036.88,1201.14 7998.43,1201.14 7974.37,1177.09 7955,1177.09 7834.62,1177.09 7672.03,1014.5 7617.57,1014.5 7586.6,983.53 v1(7575,983.53)
  Bottom Layer w10: TP772.1@7575,925 v1(7575,983.53)
REC_GPIO_19: R45.1 TP2.1 TP773.1 U1.57 U3.T9 | length 2257
  Top Layer w6: 7995.55,1221.14 8094.58,1221.14 8094.72,1221 U3.T9@8094.72,1220.32
  Top Layer w9: U1.57@6261.89,1174.88 6261.89,1125 6261.89,1123.7 6343.87,1041.71 6347.01,1041.71 6433.34,955.38 6439.18,955.38
  Top Layer w10: 6439.18,955.38 6733.17,955.38 6928.79,1151 7031.21,1151 7032.21,1150 7063.55,1150 7093.55,1120 TP2.1@7150,1120 R45.1@7260,1120 7260,1119 7291.54,1087.46 7325.69,1087.46 7344.15,1069 7669.5,1069 7702.85,1102.36 7702.85,1160.2 7720.43,1177.77 7741.76,1177.77 7761.23,1197.25 7955,1197.25 7963.2,1197.25 7987.1,1221.14 7995.55,1221.14
  Bottom Layer w10: TP2.1@7150,1120 TP773.1@7240,1120
REC_GPIO_20: R46.1 TP774.1 U1.63 U3.R8 | length 2130.6
  Top Layer w6: 8031.17,1279.37 8114.41,1279.37 U3.R8@8134.09,1259.68
  Top Layer w9: U1.63@6380,1174.88 6380,1125 6380,1123.7 6470.31,1033.38 6546.75,1033.38 ; 6970.86,1311 7080,1311
  Top Layer w10: 6546.75,1033.38 6700.47,1033.38 6888.1,1221.01 6888.1,1270.31 6928.79,1311 6970.86,1311 ; 7080,1311 7162.12,1311 7170,1303.12 R46.1@7170,1280 7170,1267.86 7184.47,1253.39 7206.59,1253.39 v1(7210.19,1257) 7227.29,1239.9 7508.54,1239.9 7510.67,1237.77 7716.9,1237.77 7758.5,1279.37 7955,1279.37 8031.17,1279.37
  Bottom Layer w10: TP774.1@7155,1280 7178,1257 v1(7210.19,1257)
REC_GPIO_21: R47.1 TP775.1 U1.67 U3.T7 | length 2010.2
  Top Layer w6: 7729.16,1297.77 7899.8,1297.77 7901.09,1299.06 7955,1299.06 U3.T7@8094.72,1299.06
  Top Layer w9: U1.67@6458.74,1174.88 6458.74,1130.88 6464.62,1125 6482.75,1106.87
  Top Layer w10: 6482.75,1106.87 6516.24,1073.38 6683.9,1073.38 6735.52,1125 6740,1129.48 6848.1,1237.58 6848.1,1286.88 6915.13,1353.91 7213,1353.91 7301.54,1353.91 7310.44,1362.81 7322.15,1374.53 7533.4,1374.53 v1(7580,1327.93) 7580,1306.65 ; R47.1@7580,1280 7580,1306.65 ; 7729.16,1297.77 7693.52,1297.77 7680.29,1311 7584.35,1311 7580,1306.65
  Bottom Layer w10: v1(7580,1327.93) 7597.07,1327.93 TP775.1@7640,1285
REC_GPIO_22: R48.1 TP504.1 U1.71 U3.P7 | length 2042.9
  Top Layer w9: U1.71@6537.48,1174.88 6537.48,1125 6537.48,1123.7 6549.3,1111.88 6667.95,1111.88 6681.07,1125 6740,1183.93 6809.6,1253.52 6809.6,1302.83 6899.18,1392.41 7271.61,1392.41 7285.83,1406.64
  Top Layer w10: 7285.83,1406.64 7314.58,1435.38 7332.43,1435.38 7367.62,1470.58 7367.62,1475.15 v1(7388.84,1496.37) 7388.84,1498.84 7400,1510 R48.1@7430,1510 ; v2(8153.78,1318.74) U3.P7@8173.46,1299.06
  Bottom Layer w10: v1(7388.84,1496.37) 7388.84,1446.16 TP504.1@7405,1430 7404.71,1429.71 7407.25,1427.17 7468.89,1427.17 7511.37,1384.7 7808.45,1384.7 7874.41,1318.74 v2(8153.78,1318.74)
REC_GPIO_23: R49.1 TP776.1 U1.72 U3.T6 | length 2054
  Top Layer w6: 7962.15,1338.43 U3.T6@8094.72,1338.43
  Top Layer w9: U1.72@6557.17,1174.88 6557.17,1130.88 6660.08,1130.88 6740,1210.8 6790.1,1260.89 6790.1,1310.2 6891.31,1411.41 7123.62,1411.41 7150.6,1438.38
  Top Layer w10: 7150.6,1438.38 7222.21,1510 R49.1@7260,1510 ; v1(7255,1455.77) 7260,1460.77 R49.1@7260,1510 ; 7962.15,1338.43 7955,1338.43 7729.56,1338.43 7672.35,1395.63 7672.35,1529.87 7661.21,1541 7290,1541 7260,1511 R49.1@7260,1510
  Bottom Layer w10: v1(7255,1455.77) TP776.1@7255,1510
REC_GPIO_24: R50.1 TP503.1 U1.83 U3.P6 | length 1750.2
  Top Layer w9: U1.83@6685.12,1381.57 6740,1381.57 6770.9,1381.57 6899.32,1510 R50.1@6950,1510
  Top Layer w10: R50.1@6950,1510 6950,1511 7023.53,1584.53 7674.25,1584.53 7713.31,1545.48 7713.31,1417.06 v1(7722.71,1417.06) ; v2(8153.78,1358.11) U3.P6@8173.46,1338.43
  Bottom Layer w10: v1(7722.71,1417.06) 7812.94,1417.06 7870,1360 TP503.1@8005,1360 8125.89,1360 8127.78,1358.11 v2(8153.78,1358.11)
REC_GPIO_25: R51.1 TP777.1 U1.91 U3.P5 | length 1826.4
  Top Layer w6: U3.P5@8173.46,1377.8 8192.67,1358.59 v2(8192.82,1358.59)
  Top Layer w9: U1.91@6685.12,1539.06 6740,1539.06 6779.04,1539.06
  Top Layer w10: 6779.04,1539.06 6817.65,1539.06 6907.74,1629.14 6950,1629.14 ; R51.1@6950,1720 6950,1629.14 ; v1(7747.73,1452) 7747.73,1454.8 7734.29,1468.24 7734.29,1552.78 7682.54,1604.53 7160.44,1604.53 7135.83,1629.14 6950,1629.14
  Bottom Layer w10: v1(7747.73,1452) 7833,1452 TP777.1@7890,1395 8019.5,1395 8030.39,1384.11 8167.3,1384.11 v2(8192.82,1358.59)
REC_GPIO_26: R52.1 TP778.1 U1.99 U3.T4 | length 1723.4
  Top Layer w6: 7996.75,1419.19 8016.8,1419.19 8018.82,1417.17 U3.T4@8094.72,1417.17
  Top Layer w9: U1.99@6685.12,1696.54 6740,1696.54 6785.12,1696.54
  Top Layer w10: 6785.12,1696.54 6815.19,1696.54 6911.18,1792.53 7416.9,1792.53 7436.24,1773.19 v1(7436.24,1769.79) 7441,1765.02 7468.87,1765.02 7490,1743.89 R52.1@7490,1720 7490,1719 7540.29,1668.71 7707.34,1668.71 7796.19,1579.87 7796.19,1507.34 7884.34,1419.19 7955,1419.19 7996.75,1419.19
  Bottom Layer w10: TP778.1@7425,1715 7425,1758.55 v1(7436.24,1769.79)
REC_GPIO_27: R53.1 TP779.1 U1.79 U3.R6 | length 1844.7
  Top Layer w6: 8002.6,1358.43 8114.09,1358.43 U3.R6@8134.09,1338.43
  Top Layer w9: U1.79@6685.12,1302.83 6726.87,1302.83 6740,1315.96 6756,1331.96
  Top Layer w10: 6756,1331.96 6876.53,1452.5 6954.69,1452.5 6981.06,1478.87 7058.52,1478.87 7089.65,1510 R53.1@7110,1510 v1@7110,1551.13 ; v1(7107.55,1554.53) 7107.55,1553.58 v1@7110,1551.13 ; 8002.6,1358.43 7955,1358.43 7738.92,1358.43 7692.35,1405 7692.35,1538.15 7669.5,1561 7119.87,1561 v1@7110,1551.13
  Bottom Layer w10: v1(7107.55,1554.53) 7138.02,1585 TP779.1@7185,1585
REC_GPIO_28: R54.1 TP780.1 U1.92 U3.T5 | length 1825.4
  Top Layer w6: 7995.35,1378.43 8033.22,1378.43 8033.85,1377.8 U3.T5@8094.72,1377.8
  Top Layer w9: U1.92@6685.12,1558.74 6729.29,1558.74 6740,1569.45 6772.48,1601.93 6778.51,1601.93
  Top Layer w10: 6778.51,1601.93 6810.87,1601.93 6879.42,1670.48 6879.42,1701.63 6929.33,1751.55 7160.44,1751.55 7170,1741.99 R54.1@7170,1720 7169.55,1719.55 v1(7169.55,1676.39) 7169.55,1674.72 7215.55,1628.71 7688.53,1628.71 7754.55,1562.7 7754.55,1489 7865.12,1378.43 7955,1378.43 7995.35,1378.43
  Bottom Layer w10: TP780.1@7110,1725 7110.76,1724.24 7121.7,1724.24 v1(7169.55,1676.39)
REC_GPIO_29: R55.1 TP781.1 U1.4 U3.R3 | length 2001.3
  Top Layer w6: 8032.81,1478.87 8035.09,1481.16 8071.13,1481.16 8075.39,1476.91 8113.72,1476.91 U3.R3@8134.09,1456.54
  Top Layer w9: U1.4@6557.17,1785.12 6557.17,1829.12 6563.05,1835 6585.39,1857.34 6612.67,1857.34
  Top Layer w10: 6612.67,1857.34 7580,1857.34 7580,1861.89 ; R55.1@7580,1950 v1(7580,1897.84) 7580,1861.89 ; 8032.81,1478.87 8013.39,1459.45 7955,1459.45 7909.02,1459.45 7838.6,1529.88 7838.6,1603.3 7580,1861.89
  Bottom Layer w10: v1(7580,1897.84) TP781.1@7580,1945
REC_GPIO_30: R56.1 TP782.1 U1.6 U3.R1 | length 2095.9
  Top Layer w9: U1.6@6517.8,1785.12 6517.8,1829.12 6523.68,1835 6529.89,1841.21 6530.65,1841.21 6548.29,1858.85 6549.39,1858.85
  Top Layer w10: 6549.39,1858.85 6568.51,1877.97 7434.34,1877.97 v1(7434.34,1889.94) 7472.78,1889.94 7490,1907.16 R56.1@7490,1950 7523.55,1950 7554.55,1981 7694.81,1981 7719.33,1956.47 7719.33,1782.27 7939.94,1561.66 7955,1561.66 8107.71,1561.66 U3.R1@8134.09,1535.28
  Bottom Layer w10: TP782.1@7425,1940 7425,1899.28 v1(7434.34,1889.94)
REC_GPIO_31: R57.1 TP783.1 U1.7 U3.P2 | length 2255
  Top Layer w6: 8090.15,1581.72 8118.2,1581.72 8153.09,1546.83 8153.09,1516.28 U3.P2@8173.46,1495.91
  Top Layer w9: U1.7@6498.11,1785.12 6498.11,1835 6498.11,1836.3 6522.52,1860.71
  Top Layer w10: 6522.52,1860.71 6560.81,1899 7267.72,1899 7267.72,1902.15 7263.29,1902.15 v1@7263.29,1906.57 ; v1(7263.29,1908.77) 7267.72,1908.77 7267.72,1906.57 v1@7263.29,1906.57 ; 8090.15,1581.72 8090.15,1582.49 7955,1582.49 7950.3,1582.49 7739.33,1793.46 7739.33,1964.76 7703.09,2001 7310,2001 7260,1951 R57.1@7260,1950 7260,1909.87 v1@7263.29,1906.57
  Bottom Layer w10: v1(7263.29,1908.77) 7267.72,1908.77 7267.72,1902.72 TP783.1@7315,1950
REC_GPIO_32: R58.1 TP502.1 U1.100 U3.R4 U10.5 | length 2283.7
  Top Layer w6: 8007.03,1437.19 8008.05,1436.17 8115.09,1436.17 U3.R4@8134.09,1417.17
  Top Layer w9: U1.100@6685.12,1716.22 6740,1716.22 6781.87,1716.22 6782.37,1716.73
  Top Layer w10: 6782.37,1716.73 6783.27,1716.73 v1@6875.77,1809.23 ; v1(6871.01,1797.54) 6875.77,1797.54 v1@6875.77,1809.23 ; v1(6900.59,1973.02) 6898.32,1973.02 6898.32,2066.11 6897.54,2066.89 6897.54,2148.54 6929,2180 R58.1@6930,2180 6931,2180 6965,2214 U10.5@6965,2290 ; 8007.03,1437.19 8005.03,1439.19 7955,1439.19 7899.87,1439.19 7816.82,1522.24 7816.82,1587.52 7715.63,1688.71 7549.41,1688.71 7535,1703.13 7535,1759.89 7479.34,1815.55 6882.09,1815.55 v1@6875.77,1809.23
  Bottom Layer w10: v1(6871.01,1797.54) 6875.77,1797.54 6875.77,1809.23 6900,1833.46 TP502.1@6900,1900 6900,1937.03 6898.32,1938.71 6898.32,1970.74 v1(6900.59,1973.02)
REC_GPIO_33: R59.1 TP501.1 U1.5 U3.T2 U10.6 | length 2444.5
  Top Layer w6: 7955,1485.22 7955,1485.6 ; U3.T2@8085.5,1495.91 U3.T2@8094.72,1495.91
  Top Layer w9: v1(6537.5,1666.77) 6537.5,1741.1 U1.5@6537.48,1785.12
  Top Layer w10: v1(6966.95,2051.74) 6966.95,2147.95 R59.1@6999,2180 ; R59.1@7000,2180 R59.1@6999,2180 ; U10.6@7015,2290 7015,2241.86 6998.61,2225.47 6998.61,2180 R59.1@6999,2180 ; v1(7655,1835) 7655,1818.08 7687.45,1785.63 7687.45,1783.69 7859.1,1612.04 7859.1,1542.66 7916.54,1485.22 7955,1485.22 ; 7955,1485.6 7981.62,1485.6 7995.42,1499.4 8082,1499.4 U3.T2@8085.5,1495.91
  Bottom Layer w10: v1(6537.5,1666.77) 6567.5,1666.77 6734.41,1833.68 6734.41,1929.08 6835.86,2030.53 6945.74,2030.53 v1(6966.95,2051.74) 6982.78,2035.91 7399.5,2035.91 7600.41,1835 v1(7655,1835)
REC_GPIO_34: R60.1 TP3.1 TP784.1 U1.43 U3.T13 | length 3240.2
  Top Layer w6: 8074.7,1062.83 U3.T13@8094.72,1062.83
  Top Layer w9: 5995.34,1361.11 6015.8,1381.57 6040,1381.57 U1.43@6074.88,1381.57
  Top Layer w10: 5995.34,1361.11 5930.97,1296.74 5930.97,1053.62 6153.88,830.71 6260.32,830.71 6351.03,740 R60.1@6950,740 6950,739 6975.61,713.39 6975.61,683.4 7029.01,630 TP3.1@7090,630 7213.83,630 7215.34,631.51 7280.44,631.51 7309.5,660.56 7367.82,660.56 7379.38,649 7686.07,649 7776.29,739.23 7776.29,930.35 7898.76,1052.82 7955,1052.82 8064.68,1052.82 8074.7,1062.83
  Bottom Layer w10: TP784.1@6955,690 7015,630 TP3.1@7090,630
REC_INDICTOR: R1079.1 TP785.1 U3.B14 | length 492.1
  Top Layer w6: U3.B14@8645.91,1023.46 8665.67,1003.7 8695.13,1003.7 8742.83,956 v1(8742.83,924.09)
  Top Layer w10: R1079.1@8740,650 8742.83,650 8742.83,835 v1(8742.83,924.09)
  Bottom Layer w10: v1(8742.83,924.09) 8745.91,924.09 TP785.1@8785,885
REC_INV_IO_0: R875.1 TP786.1 U6.J16 | length 7100.3
  Top Layer w10: U6.J16@2300.32,1104.72 2300.32,1024.44 2298.54,1022.67 2298.54,950 2298.54,643.73 2427.89,514.38 2427.89,456.22 2499.14,384.98 v1(2499.14,341.11) 2499.14,256.19 2606.74,148.59 8068.4,148.59 8137.5,217.69 8137.5,568.5 8169,600 R875.1@8170,600
  Bottom Layer w10: v1(2499.14,341.11) 2499.14,374.46 2514.68,390 TP786.1@2510,390
REC_INV_IO_1: R877.1 TP787.1 U6.J14 | length 6693.1
  Top Layer w6: U6.J14@2300.32,1183.46 2319.32,1164.46 2319.32,1014.38 2318.54,1014.38
  Top Layer w10: 2318.54,1014.38 2318.54,950 2318.54,652.02 2447.89,522.67 2447.89,474.29 2534.73,387.45 2534.73,249.53 2615.67,168.59 7872.19,168.59 7984.9,281.29 v1@7984.9,290 ; v1(7984.9,299.87) v1@7984.9,290 ; R877.1@8040,290 v1@7984.9,290
  Bottom Layer w10: TP787.1@7930,295 7980.03,295 v1(7984.9,299.87)
REC_INV_IO_2: R879.1 TP1888.1 U6.H16 | length 6610.8
  Top Layer w6: 2339.68,941.84 2339.68,950 U6.H16@2339.68,1104.72
  Top Layer w10: 2339.68,941.84 2339.68,659.16 2467.89,530.95 2467.89,482.57 2555.31,395.15 2555.31,267.69 2566.72,256.29 2588,235 v1(2600,235) 2600,227.89 2598.71,226.6 2598.71,218.31 2628.44,188.59 7859.08,188.59 7954.9,284.4 7954.9,317.11 8040,402.21 R879.1@8040,450
REC_INV_IO_3: R881.1 TP1889.1 U6.H15 | length 6747.1
  Top Layer w6: U6.H15@2339.68,1144.09 2359.93,1123.84 2359.93,1092.45 2358.43,1090.94 2358.43,1063.35
  Top Layer w10: 2358.43,1063.35 2358.43,971.32 2360.15,969.59 2360.15,950 2360.15,666.97 2487.89,539.24 2487.89,490.86 2590,388.75 v1(2590,325) 2611.21,303.79 2611.21,266.85 2669.48,208.59 7770.51,208.59 7850.81,208.6 7911,268.79 7911,302.64 7956.89,348.53 7956.89,555.52 8001.37,600 R881.1@8040,600
REC_INV_IO_4: R883.1 TP1890.1 U6.G16 | length 6275.8
  Top Layer w6: U6.G16@2379.06,1104.72 2379.06,980.29 2380.7,978.64
  Top Layer w10: 2380.7,978.64 2380.7,950 2380.7,674.71 2507.89,547.52 2507.89,499.14 2631.57,375.46 2631.57,316.79 2653.45,294.91 v1(2654.89,294.91) 2654.89,287.74 2714.04,228.59 7762.04,228.59 7823.45,290 R883.1@7880,290
  Bottom Layer w10: v1(2654.89,294.91) 2654.89,275.9 2687.89,242.89 TP1890.1@2690,245
REC_INV_IO_5: R885.1 TP1891.1 U6.G15 | length 6342.2
  Top Layer w6: U6.G15@2379.06,1144.09 2398.6,1124.55 2398.6,1058.97
  Top Layer w10: 2398.6,1058.97 2398.6,1013.18 2398.43,1013.01 2398.43,990.65 2400.87,988.2 2400.87,950 2400.87,682.82 2527.89,555.8 2527.89,507.42 2701.52,333.8 2701.52,298.91 v1@2703.07,297.35 ; v1(2702.38,296.66) v1@2703.07,297.35 ; R885.1@7880,450 7865.3,450 7663.89,248.59 2751.84,248.59 v1@2703.07,297.35
  Bottom Layer w10: v1(2702.38,296.66) 2719.04,280 TP1891.1@2775,280
REC_INV_IO_6: R887.1 TP792.1 U6.F16 | length 6296.4
  Top Layer w6: U6.F16@2418.43,1104.72 2419.18,1104.72 2419.18,1003.82
  Top Layer w10: 2419.18,1003.82 2419.18,998.89 2421.66,996.4 2421.66,950 2421.66,690.31 2547.89,564.09 2547.89,515.71 2795.01,268.59 7562.88,268.59 7822.63,528.34 7822.63,579.58 7835.15,592.11 v1(7835.15,600) R887.1@7880,600
  Bottom Layer w10: v1(7835.15,600) 7840.15,605 TP792.1@7880,605
REC_INV_IO_7: R886.1 TP793.1 U6.F15 | length 5770.5
  Top Layer w6: U6.F15@2418.43,1144.09 2438.46,1124.06 2438.46,1012.99
  Top Layer w10: 2438.46,1012.99 2441.72,1009.72 2441.72,950 2441.72,698.54 2567.89,572.37 2567.89,523.99 2803.3,288.59 6942.74,288.59 v1(7040.2,386.05) 7124.15,470 R886.1@7430,470
  Bottom Layer w10: v1(7040.2,386.05) 7090,386.05 TP793.1@7090,390
REC_INV_IO_8: R884.1 TP479.1 U6.F14 | length 5903.7
  Top Layer w10: U6.F14@2418.43,1183.46 v2(2438.11,1163.78) ; v1(7574.14,422.15) 7574.14,431.18 7577.66,434.71 7577.66,436.66 7580,439 R884.1@7580,470
  Bottom Layer w10: v2(2438.11,1163.78) 2438.11,1050.32 2429,1041.21 2429,938.79 2482.17,885.61 2567.88,885.61 2598.13,855.37 2598.13,844.95 2669.07,774 2686.15,774 2745.15,715 2746.36,715 2771.68,689.67 2771.68,688.47 2772.27,687.88 2772.27,537.9 2860.02,450.14 2872.43,450.14 3059.29,263.29 7136.94,263.29 7173.65,300 TP479.1@7195,300 7195,308.45 7316.53,429.98 7509.97,429.98 7517.79,422.15 v1(7574.14,422.15)
REC_INV_IO_9: R882.1 TP794.1 U6.E16 | length 5540.5
  Top Layer w6: U6.E16@2457.8,1104.72 2458.44,1104.72 2458.44,1022.93
  Top Layer w10: 2458.44,1022.93 2462.02,1019.34 2462.02,950 2462.02,706.52 2587.89,580.66 2587.89,532.28 2811.58,308.59 6894.43,308.59 6894.43,309.64 7107.21,522.41 v1(7185.44,522.41) 7223.41,522.41 7239.19,538.19 7260,538.19 R882.1@7260,540
  Bottom Layer w10: TP794.1@7135,525 7170.02,525 7172.61,522.41 v1(7185.44,522.41)
REC_INV_IO_10: R880.1 TP795.1 U6.E14 | length 5841.4
  Top Layer w6: U6.E14@2457.8,1183.46 2476.8,1164.46 2476.8,1048.54 2483.66,1041.68 2483.66,991.83
  Top Layer w10: 2483.66,991.83 2483.66,950 2483.66,714.93 2482.78,714.05 2607.89,588.94 2607.89,540.56 2819.86,328.59 6879.98,328.59 7103.85,552.46 7214.38,552.46 7252.12,590.2 7295.7,590.2 7326.07,620.56 7351.25,620.56 7378.09,593.72 7377.68,593.32 v1(7378.49,593.32) 7403.8,593.32 7430,567.12 R880.1@7430,540
  Bottom Layer w10: v1(7378.49,593.32) 7388.32,593.32 TP795.1@7420,625
REC_INV_IO_11: R878.1 TP796.1 U6.D14 | length 6004.1
  Top Layer w6: U6.D14@2497.17,1183.46 2516.32,1164.31 2516.32,1053.44 2523.99,1045.77
  Top Layer w10: 2523.99,1045.77 2548.38,1021.38 2548.38,950 2548.38,907.53 2521.71,880.86 2521.71,704.57 2627.89,598.4 2627.89,548.85 2828.15,348.59 6856.31,348.59 7081,573.27 7194.4,573.27 7232.63,611.51 7288.72,611.51 7317.78,640.56 7359.53,640.56 7376.15,623.95 7561.38,623.95 v1(7588.41,596.91) 7580,588.5 R878.1@7580,540
  Bottom Layer w10: TP796.1@7580,550 7580,588.5 v1(7588.41,596.91)
REC_INV_IO_12: R63.1 TP1892.1 U6.B16 | length 371.4
  Top Layer w10: U6.B16@2575.91,1104.72 2646.99,1033.64 v1(2646.99,974.66)
  Bottom Layer w10: v1(2646.99,974.66) 2661.65,960 2735.56,960 2750,974.44 R63.1@2750,990 2750,991.8 2752.97,994.78 2800.22,994.78 TP1892.1@2820,975
REC_INV_IO_13: R62.1 TP1893.1 U6.C15 | length 278.8
  Top Layer w6: U6.C15@2536.54,1144.09 2556.14,1124.49 2556.14,1096.55 2610.59,1042.1 2610.59,1015 v1@2610.59,1007.95
  Top Layer w10: v1@2610.59,1015 v1(2615,1015)
  Bottom Layer w10: TP1893.1@2610.59,1015 2610.59,1018.93 TP1893.1@2615,1018.93 ; v1(2615,1015) TP1893.1@2615,1018.93 ; R62.1@2690,990 2690,1004.18 2675.25,1018.93 TP1893.1@2615,1018.93
REC_INV_IO_14: R61.1 TP1894.1 U6.D16 | length 248.5
  Top Layer w6: U6.D16@2497.17,1104.72 2497.17,1058.63 2500.11,1055.68 2500.11,1033 2513.55,1019.57 2513.55,1011.22 v1(2515.99,1011.22)
  Bottom Layer w10: TP1894.1@2490,1090 2490,1081.77 2460,1051.77 R61.1@2460,1020 2498.27,1020 2511.52,1006.75 v1(2515.99,1011.22)
REC_OC: D239.3 D244.3 D245.3 D246.3 D387.3 D388.3 R2511.2 TP478.1 | length 1486.7
  Top Layer w10: v1(8211.27,5029.51) v1@8206.37,5029.51 ; v1(8234.01,4529.77) 8233.61,4529.77 8200.68,4562.7 v1(8200.68,4724.6) 8200.68,5029.51 v1@8206.37,5029.51 ; v1(8238.44,5265.32) 8238.44,5143.88 v1(8206.37,5111.8) v1@8206.37,5029.51
  Bottom Layer w10: R2511.2@8120,4430 8185.11,4430 8185.11,4430.98 8194.12,4440 D239.3@8218.5,4440 8218.5,4521.32 ; TP478.1@8120,5405 8120.95,5405.95 8126.89,5400 D244.3@8208.5,5400 8208.5,5295.26 v1(8238.44,5265.32) ; v1(8200.68,4724.6) 8208.5,4732.42 D245.3@8208.5,4780 ; v1(8206.37,5111.8) 8208.5,5113.94 D388.3@8208.5,5170 ; D387.3@8208.5,4610 8208.5,4562.1 8218.5,4552.1 8218.5,4521.32 ; D246.3@8208.5,4970 8208.5,5026.73 v1(8211.27,5029.51) ; v1(8234.01,4529.77) 8226.95,4529.77 8218.5,4521.32
REC_RESET: R664.1 R1067.1 R1355.1 TP797.1 | length 2682.9
  Top Layer w10: R1067.1@8200,1870 R664.1@8200,1940 8221.81,1940 8235.56,1953.75 8235.56,2034.34 8230,2039.89 8230,2085.11 8251,2106.11 8251,2364.83 8244.09,2371.75 8244.09,2670.37 8285.6,2711.88 8285.6,3300.73 ; v1(8319.7,3300.73) 8285.6,3300.73 ; R1355.1@8330,4240 8330,4211.85 8155.51,4037.36 8155.51,3853.96 8121.58,3820.03 8121.58,3443.73 8264.58,3300.73 8285.6,3300.73
  Bottom Layer w10: TP797.1@8285,3340 8319.7,3305.3 v1(8319.7,3300.73)
REC_SCI_RXD: J6.2 R2728.1 TP477.1 U3.N14 | length 5067.9
  Top Layer w10: v2(8193.15,1003.78) U3.N14@8212.83,1023.46
  Bottom Layer w10: J6.2@3716.06,520 3787.04,590.98 3862.47,590.98 3904.06,549.39 3904.06,424.34 3937.85,390.55 4215,390.55 4215,396.29 ; R2728.1@4215,445 4215,396.29 ; v2(8193.15,1003.78) 8127.58,938.21 8098.64,938.21 8085.81,951.04 8023.34,951.04 7990.63,918.33 7958.7,918.33 7855,814.63 TP477.1@7855,795 7807.31,795 7692.95,680.64 7586.28,680.64 7517.27,611.63 7517.27,572.22 7500.17,555.12 7286.84,555.12 7274.12,567.84 7119.86,567.84 7056.12,504.09 7056.12,488.34 6956.57,388.79 4240.32,388.79 4232.82,396.29 4215,396.29
REC_SCI_TXD: J6.1 R2729.1 TP476.1 U3.M14 | length 5089.3
  Top Layer w10: J6.1@3814.49,520 3875.47,520 3948.06,447.42 v1(3975.07,447.42) ; v2(8232.52,1003.78) U3.M14@8252.2,1023.46
  Bottom Layer w10: J6.1@3814.49,520 3814.49,438.62 3884.71,368.4 6965.1,368.4 7029.89,433.19 7158.63,433.19 7260.42,534.98 7509.62,534.98 7537.27,562.64 7537.27,602.27 7579.67,644.67 7635.76,644.67 7636.09,645 TP476.1@7640,645 7697.63,645 7812.41,759.78 7869.28,759.78 7943.05,833.55 8009.5,833.55 8033.34,857.38 8040.92,857.38 8082.17,898.63 8099.66,898.63 8118.31,917.28 8136.42,917.28 8175.79,956.64 8185.38,956.64 v2(8232.52,1003.78) ; v1(3975.07,447.42) 4027.59,447.42 R2729.1@4030,445
REC_SET: R1478.2 TP798.1 U3.C11 | length 161.9
  Top Layer w10: U3.C11@8606.54,1141.57 v2(8626.22,1121.89)
  Bottom Layer w10: v2(8626.22,1121.89) 8628.11,1120 R1478.2@8670,1120 8670,1160 TP798.1@8705,1195
REC_shutdown: D161.1 D161.2 D216.2 D236.1 D236.2 D249.1 D287.3 D397.1 R1836.1 TP475.1 | length 1127.3
  Top Layer w10: R1836.1@3850,4830 3855.71,4830 3876.62,4809.09 3932.5,4809.09 D236.1@3932.5,4798.5 3970,4798.5 ; D287.3@3970,4721.5 3970,4798.5 ; v1(4037.31,4849.45) 4038.11,4848.66 4038.11,4832.61 4007.5,4802 D236.2@4007.5,4798.5 3970,4798.5
  Bottom Layer w10: D161.2@3892.5,5218.5 D161.1@3967.5,5218.5 4010.56,5218.5 4041.44,5187.62 4041.44,5018.5 D397.1@4037.5,5018.5 4037.5,4972.5 4050,4960 TP475.1@4050,4925 4048.34,4926.66 4037.31,4915.62 v1(4037.31,4849.45) 4176.98,4849.45 4187.5,4838.93 D249.1@4187.5,4808.5 D216.2@4187.5,4701.5
REC_SHUTDOWN_CPLD: D160.1 D160.2 R707.1 R1019.1 TP971.1 | length 305.2
  Top Layer w10: R1019.1@8300,2170 8300,2203.75 ; R707.1@8300,2240 8300,2203.75 ; v1(8333.67,2203.75) 8300,2203.75
  Bottom Layer w10: D160.2@8212.5,2198.5 D160.1@8287.5,2198.5 8328.42,2198.5 v1(8333.67,2203.75) 8388.88,2203.75 8405,2219.87 TP971.1@8405,2220
REC_VIN_A/ADREF: C1076.2 D39.3 R14.1 R903.2 TP474.1 | length 541.7
  Bottom Layer w10: R14.1@6420,2160 6420,2206.68 6430.9,2217.57 6430.9,2237.28 ; TP474.1@6470,2240 6433.61,2240 6430.9,2237.28 ; R903.2@6550,2540 C1076.2@6450,2540 6450,2499.83 6420,2469.83 D39.3@6420,2431.5 6420,2253.32 6430.9,2242.43 6430.9,2237.28
REC_VIN_B: C1074.1 D34.3 R2.1 R907.2 TP799.1 | length 461.2
  Bottom Layer w10: C1074.1@5160,2540 R907.2@5220,2540 5220,2485 5205,2470 5205,2431.5 D34.3@5190,2431.5 TP799.1@5190,2255 R2.1@5190,2160